# Altium PCB killswitch.PcbDoc
Units mil, origin at the board's own origin, x right, y up, seen from the top; angles counter-clockwise.
Board outline 1530 x 1800 mil, 2 copper layers (Top Layer, Bottom Layer); 17 components, 17 nets, 80 pads, 10 vias.
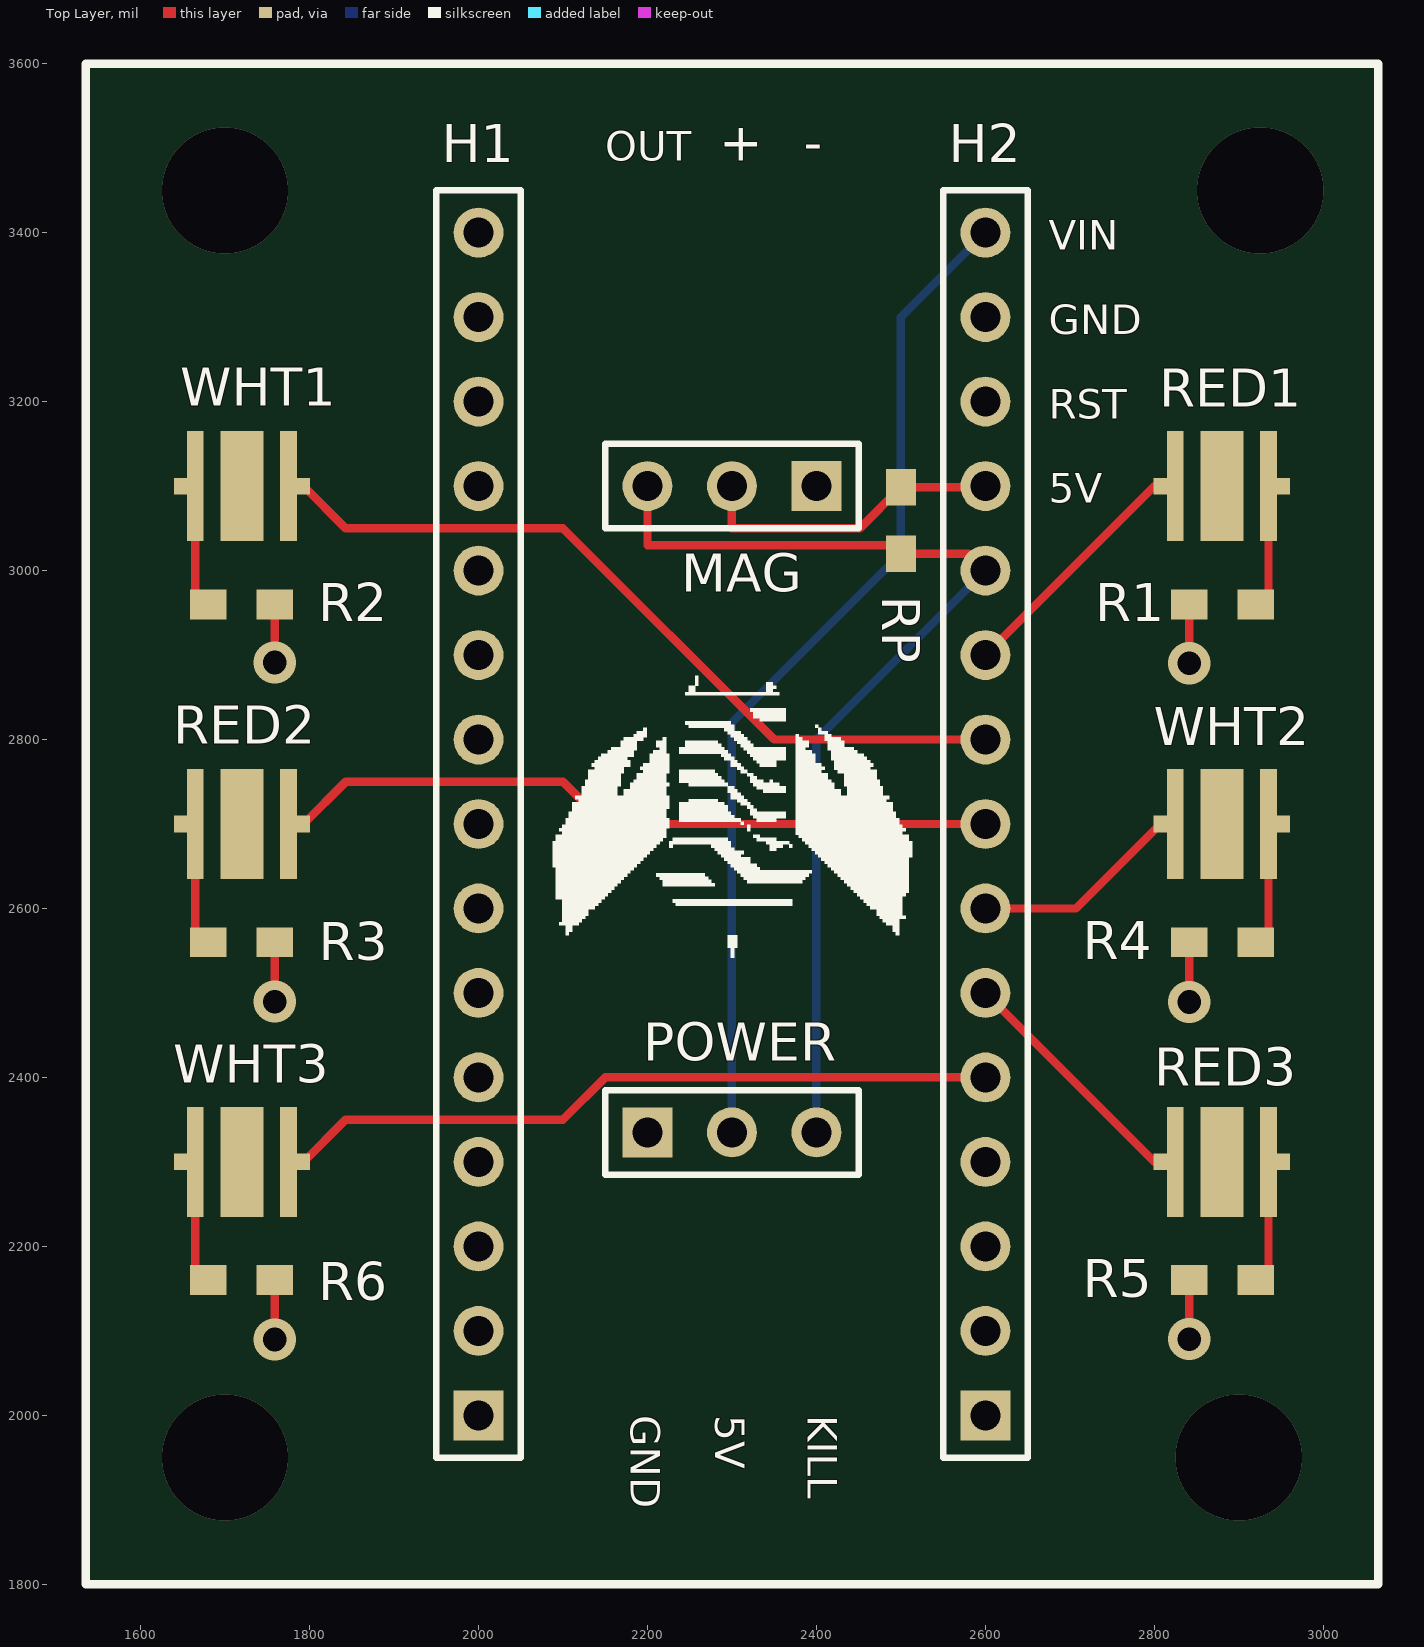
[diagram p0: Top Layer view]
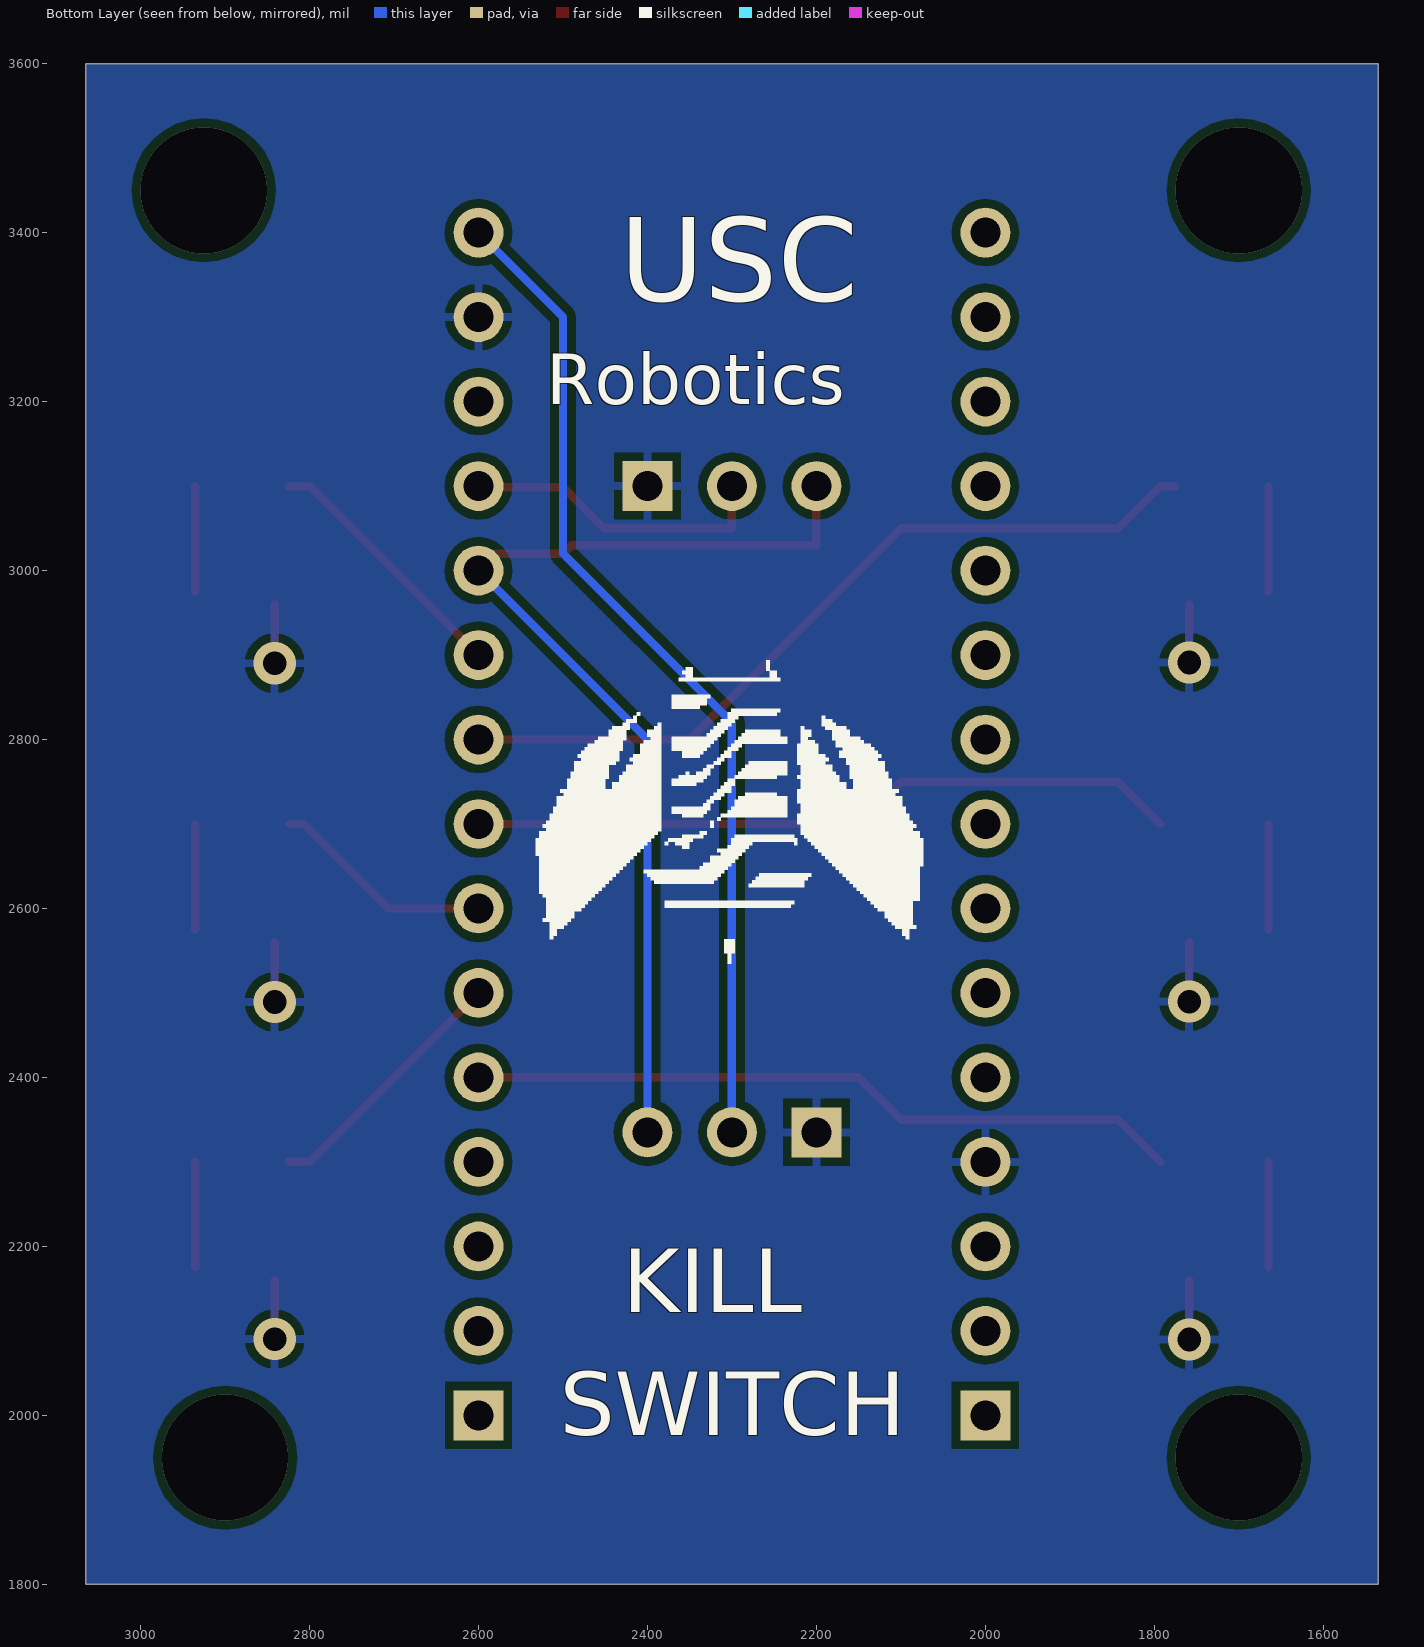
[diagram p1: Bottom Layer view, seen from below]

## Layer stack, top to bottom
Top Solder: solder mask 0.4, Solder Resist, Dk 3.5
Top Layer: signal copper 1.4
Dielectric1: dielectric 12.6, FR-4, Dk 4.8
Bottom Layer: signal copper 1.4
Bottom Solder: solder mask 0.4, Solder Resist, Dk 3.5

## Board outline
1535,1800 3065,1800 3065,3600 1535,3600

## Design rules (kind name [scope] priority, off if disabled: settings)
Clearance [All] p1: gap=10
FabricationTestPointUsage TestPointUsage [All] p1: valid=0 allowmultiple=FALSE
FabricationTestpoint Testpoint [All] p1: side=3 testpointundercomponent=TRUE minsize=40 maxsize=100 preferedsize=60 minholesize=0 maxholesize=40 preferedholesize=32 testpointgrid=1 allowsidetop=TRUE allowsidebottom=TRUE usegrid=TRUE gridtolerance=0.01
PolygonConnect [All] p1: connectstyle=Relief reliefconductorwidth=10 reliefentries=4 polygonreliefangle="90 Angle" airgapwidth=10
RoomDefinition killswitch [InComponentClass('killswitch')] p1: confinementstyle=ConfineIn formatcopy=TRUE lockcomponents=FALSE outline 800,845 7255,845 7255,5100 800,5100
RoutingVias [All] p1: holewidth=28 width=50 viastyle="Through Hole" minholewidth=28 minwidth=50 maxholewidth=28 maxwidth=50
SilkToSolderMaskClearance SilkscreenOverComponentPads [IsPad] p1: minsilkscreentomaskgap=10 clearancetoexposedcopper=TRUE
SolderMaskExpansion [All] p1: expansion=4
UnpouredPolygon [All] p1: allowunpoured=FALSE
Width [All] p1: maxlimit=10 minlimit=10 preferedwidth=10
26 further rules are at their usual default settings.

## Components (designator, comment, footprint, x,y, rotation, side; value= is the part's Value field where it differs from the comment)
H1 "Header 15" HDR1X15 2000,2000 r90 top
H2 "Header 15" HDR1X15 2600,2000 r90 top
MAG "Header 3" HDR1X3 2400,3100 r180 top
POWER "Header 3" HDR1X3 2200,2335 r0 top
R1 "Res3" 0805_RES 2920,2960 r180 top
R2 "Res3" 0805_RES 1680,2960 r0 top
R3 "Res3" 0805_RES 1680,2560 r0 top
R4 "Res3" 0805_RES 2920,2560 r180 top
R5 "Res3" 0805_RES 2920,2160 r180 top
R6 "Res3" 0805_RES 1680,2160 r0 top
RED1 "LED0" cree_led 2880,3100 r0 top
RED2 "LED0" cree_led 1720,2700 r180 top
RED3 "LED0" cree_led 2880,2300 r0 top
RP "Res3" 0805_RES 2500,3020 r90 top
WHT1 "LED0" cree_led 1720,3100 r180 top
WHT2 "LED0" cree_led 2880,2700 r0 top
WHT3 "LED0" cree_led 1720,2300 r180 top

## Footprints (in the part's own frame and the unit in brackets; to place one, negate y for a bottom-side part, rotate by r counter-clockwise, add the part's x,y. Pads: shape width x height; smd on the part's side, far side on the other; paste and mask are expansions set on the pad)
0805_RES [mm]
  rect 1.1x0.9 smd: 1(0,0) 2(2,0)
cree_led [mm]
  rect 0.4x0.5 smd: 1(-1.85,0) 2(1.85,0)
  rect 0.5x3.3 smd: 1(-1.4,0) 2(1.4,0)
  rect 1.3x3.3 smd: ""(0,0)
  body extent -1.73,-1.73 1.73,1.73, height 2.01
HDR1X3 [mm] "Connector; Header; 3 Position"
  rect 1.5x1.5 hole 0.9: 1(0,0)
  round 1.5 hole 0.9: 2(2.54,0) 3(5.08,0)
  silkscreen extent -1.27,-1.27 6.35,1.27
HDR1X15 [mm] "Connector; Header; 15 Position"
  rect 1.5x1.5 hole 0.9: 1(0,0)
  round 1.5 hole 0.9: 2(2.54,0) 3(5.08,0) 4(7.62,0) 5(10.16,0) 6(12.7,0) 7(15.24,0) 8(17.78,0) 9(20.32,0) 10(22.86,0) 11(25.4,0) 12(27.94,0) 13(30.48,0) 14(33.02,0) 15(35.56,0)
  silkscreen extent -1.27,-1.27 36.83,1.27

## Part data
H1 H2: "Header, 15-Pin"
MAG POWER: "Header, 3-Pin"
R1 R2 R3 R4 R5 R6 RP: "Resistor"
RED1 RED2 RED3 WHT1 WHT2 WHT3: "Typical INFRARED GaAs LED"

## Via types
v1: diameter 50, hole 28, Top Layer to Bottom Layer, 6 vias
v2: diameter 149.5, hole 149.5, Top Layer to Bottom Layer, 4 vias

## Nets (pads, with @x,y where several pads share a name; then routed paths per layer and width w, separated by ;. In a path a pad name is that pad's centre, name@x,y a point inside that pad or via, vN(x,y) a via of type N, cw(c..) or ccw(c..) an arc to the next point about the centre after c; other vN are vias at no path point)
5V: H2.12 MAG.2 RP.2 | length 368.9
  Top Layer w10: MAG.2 2300,3050 2451.26,3050 RP.2 H2.12@2598.74,3098.74
A0: H2.11 MAG.3 POWER.3 RP.1 | length 1230.3
  Top Layer w10: MAG.3 2200,3030 2490,3030 RP.1 2580,3020 H2.11
  Bottom Layer w10: POWER.3 2400,2800 H2.11
A1: H2.10 RED1.1 | length 314.9
  Top Layer w10: H2.10 RED1.1@2800,3100 ; RED1.1@2824.88,3100 RED1.1@2807.17,3100 ; RED1.1@2800,3100 RED1.1@2807.17,3100 ; RED1.1@2800,3100 RED1.1@2807.17,3100
A2: H2.9 WHT1.1 | length 949.1
  Top Layer w10: WHT1.1@1775.12,3100 1792.83,3100 1842.83,3050 2100,3050 2350,2800 H2.9
A3: H2.8 RED2.1 | length 848.6
  Top Layer w10: RED2.1@1792.83,2700 1842.83,2750 2100,2750 2150,2700 H2.8
A4: H2.7 WHT2.1 | length 266.3
  Top Layer w10: H2.7 2707.17,2600 2807.17,2700 WHT2.1@2824.88,2700
A5: H2.6 RED3.1 | length 307.7
  Top Layer w10: H2.6 2800,2300 2807.17,2300 RED3.1@2824.88,2300
A6: H2.5 WHT3.1 | length 848.6
  Top Layer w10: WHT3.1@1792.83,2300 1842.83,2350 2100,2350 2150,2400 H2.5
A7: H2.4
GND: H1.4 H2.14 MAG.1 POWER.1 R1.2 R2.2 R3.2 R4.2 R5.2 R6.2 | length 419.5
  Top Layer w10: v1(1758.74,2089.74) R6.2 ; v1(1758.74,2489.74) R3.2 ; v1(1758.74,2891.26) R2.2 ; v1(2841.26,2090.26) R5.2 ; v1(2841.26,2489.26) R4.2 ; v1(2841.26,2890.26) R1.2
NetR1_1: R1.1 RED1.2 | length 124.9
  Top Layer w10: R1.1@2935.12,2975.12 RED1.2@2935.12,3100
NetR2_1: R2.1 WHT1.2 | length 124.9
  Top Layer w10: R2.1@1664.88,2975.12 WHT1.2@1664.88,3100
NetR3_1: R3.1 RED2.2 | length 124.9
  Top Layer w10: R3.1@1664.88,2575.12 RED2.2@1664.88,2700
NetR4_1: R4.1 WHT2.2 | length 124.9
  Top Layer w10: R4.1@2935.12,2575.12 WHT2.2@2935.12,2700
NetR5_1: R5.1 RED3.2 | length 124.9
  Top Layer w10: R5.1@2935.12,2175.12 RED3.2@2935.12,2300
NetR6_1: R6.1 WHT3.2 | length 124.9
  Top Layer w10: R6.1@1664.88,2175.12 WHT3.2@1664.88,2300
VIN: H2.15 POWER.2 | length 1189.3
  Bottom Layer w10: POWER.2 2300,2820 2500,3020 2500,3300 H2.15
pads on no net: H1.1 H1.2 H1.3 H1.5 H1.6 H1.7 H1.8 H1.9 H1.10 H1.11 H1.12 H1.13 H1.14 H1.15 H2.1 H2.2 H2.3 H2.13 RED1. RED2. RED3. WHT1. WHT2. WHT3.
copper on no net:
  other v2: 1700,1950 2900,1950 1700,3450 2925.2,3450

## Polygon pours and split planes (outlines as drawn)
GND on Bottom Layer "Bottom_GND" (solid, pour order 1000): 1535,1800 3065,1800 3065,3600 1535,3600

## Silkscreen, mask and mechanical layers (free items; w line width, h text height)
Top Overlay:
  drawing of 19 lines, arcs and shapes, not listed
  text "OUT" at 2150,3485 h35
  text "+" at 2285,3485 h45
  text "-" at 2385,3485 h45
  text "VIN" at 2675,3380 h35
  text "GND" at 2675,3280 h35
  text "RST" at 2675,3180 h35
  text "5V" at 2675,3080 h35
  text "GND" at 2180,2000 h35 r270
  text "5V" at 2280,2000 h35 r270
  text "KILL" at 2390,2000 h35 r270
Bottom Overlay:
  drawing of 15 lines, arcs and shapes, not listed
  text "USC" at 2433.07,3318.9 h100
  text "Robotics" at 2519.68,3196.85 h60
  text "KILL" at 2429.13,2122.05 h75
  text "SWITCH" at 2503.94,1976.38 h75